# EAGLE board twip-mb-mirror (EAGLE 9.2.2)
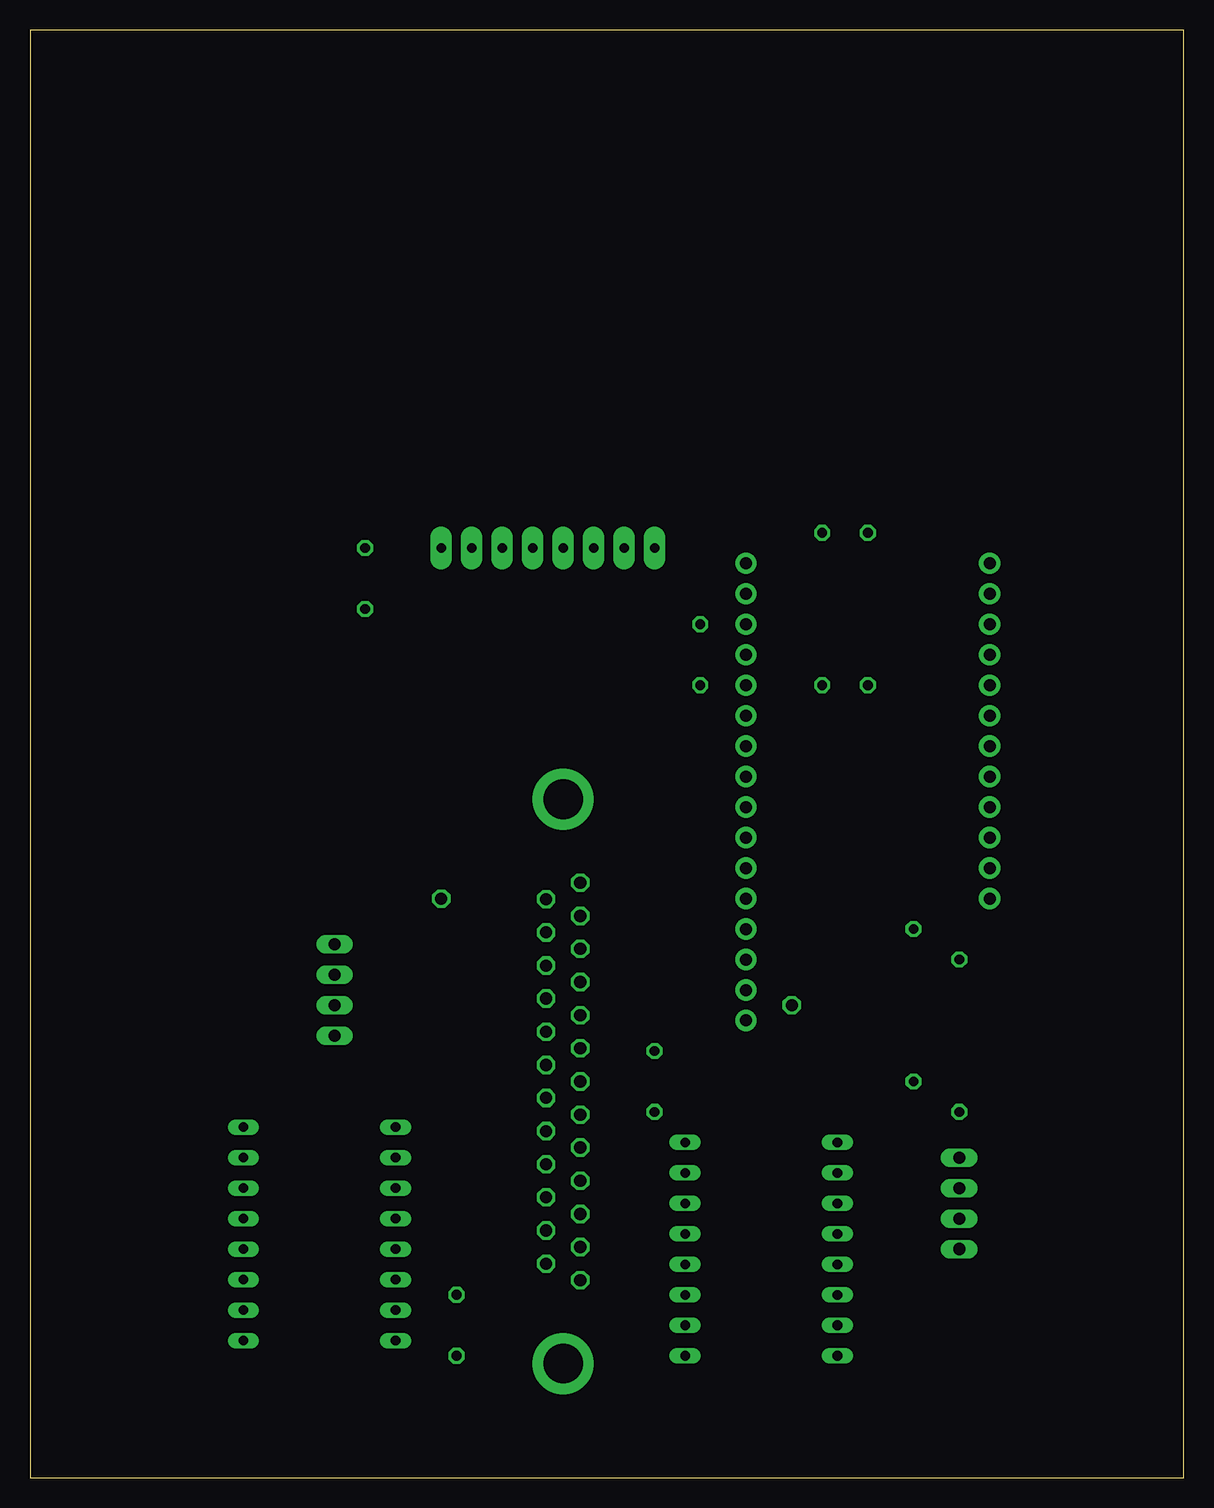
[diagram p0: board, top side]
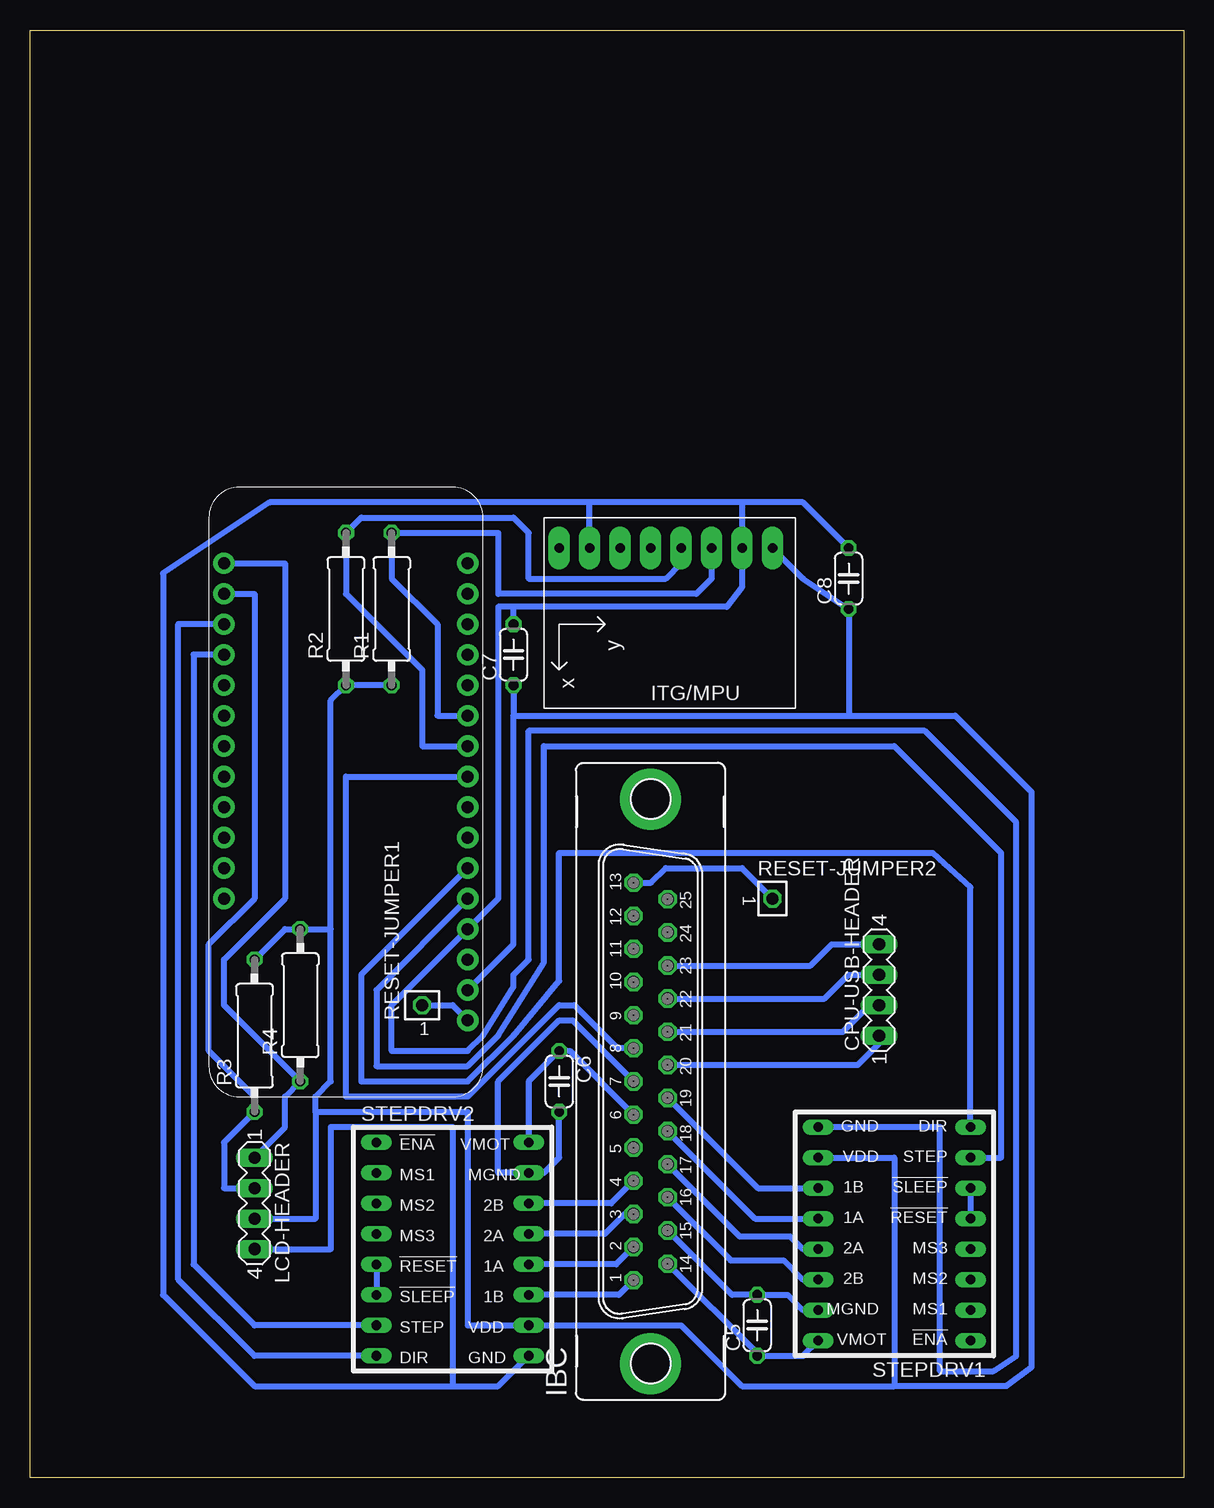
[diagram p1: board, bottom side, seen from below]

Size 96.19 x 120.64 mm. Coordinates in mm from the lower left corner, seen from the top.
Outline: 0,0 96.19,0 96.19,120.64 0,120.64 0,0
Copper layers (1*16): Top 0.035mm / dielectric 1.5mm / Bottom 0.035mm
Design rules "default": minimum track width 6mil, minimum drill 0.35mm, track to track 6mil, track to pad 6mil, pad to pad 6mil, via to via 6mil, smd to smd 6mil, copper to edge 40mil, drill to drill 6mil, minimum pad ring 10mil, minimum via ring 8mil, stop-mask expansion 4mil, vias tented up to drill 0mil, thermal gap 10mil

## Footprints (pad centres in the part's own frame; a part is rotated, then mirrored left to right if it is on the bottom)
C050-024X044 = drill 0.813 octagon: 1 -2.54,0; 2 2.54,0
MA04-1 = drill 1.016 long: 1 -3.81,0; 2 -1.27,0; 3 1.27,0; 4 3.81,0
M25VP = drill 1.016 octagon: 1 -16.561,1.422; 2 -13.792,1.422; 3 -11.049,1.422; 4 -8.28,1.422; 5 -5.512,1.422; 6 -2.769,1.422; 7 0,1.422; 8 2.769,1.422; 9 5.512,1.422; 10 8.28,1.422; 11 11.049,1.422; 12 13.792,1.422; 13 16.561,1.422; 14 -15.189,-1.422; 15 -12.421,-1.422; 16 -9.652,-1.422; 17 -6.909,-1.422; 18 -4.14,-1.422; 19 -1.372,-1.422; 20 1.372,-1.422; 21 4.14,-1.422; 22 6.909,-1.422; 23 9.652,-1.422; 24 12.421,-1.422; 25 15.189,-1.422 | drill 3.302 pad 5.08: G1 -23.52,0; G2 23.52,0
FEATHERWING_NOHOLES = drill 1 pad 1.778: 1 6.35,1.27; 2 8.89,1.27; 3 11.43,1.27; 4 13.97,1.27; 5 16.51,1.27; 6 19.05,1.27; 7 21.59,1.27; 8 24.13,1.27; 9 26.67,1.27; 10 29.21,1.27; 11 31.75,1.27; 12 34.29,1.27; 13 36.83,1.27; 14 39.37,1.27; 15 41.91,1.27; 16 44.45,1.27; 17 44.45,21.59; 18 41.91,21.59; 19 39.37,21.59; 20 36.83,21.59; 21 34.29,21.59; 22 31.75,21.59; 23 29.21,21.59; 24 26.67,21.59; 25 24.13,21.59; 26 21.59,21.59; 27 19.05,21.59; 28 16.51,21.59
0309/12 = drill 0.813 octagon: 1 -6.35,0; 2 6.35,0
TSW-101-XX-G-S = drill 1 pad 1.5 octagon: 1 0,0
POLOLULU2128 = drill 0.8 long: 1 -7.62,7.62; 2 -7.62,5.08; 3 -7.62,2.54; 4 -7.62,0; 5 -7.62,-2.54; 6 -7.62,-5.08; 7 -7.62,-7.62; 8 -7.62,-10.16; 9 5.08,-10.16; 10 5.08,-7.62; 11 5.08,-5.08; 12 5.08,-2.54; 13 5.08,0; 14 5.08,2.54; 15 5.08,5.08; 16 5.08,7.62
GY-521 = drill 0.8 pad 1.778 long: ADO -8.89,-6.35; GND -8.89,6.35; INT -8.89,-8.89; SCL -8.89,3.81; SDA -8.89,1.27; VCC -8.89,8.89; XCL -8.89,-3.81; XDA -8.89,-1.27

## Placement (x,y rotation side)
C5  [C050-024X044]  35.56,12.7 90 bottom
C6  [C050-024X044]  52.07,33.02 270 bottom
C7  [C050-024X044]  55.88,68.58 90 bottom
C8  [C050-024X044]  27.94,74.93 90 bottom
CPU-USB-HEADER  [MA04-1]  25.4,40.64 90 bottom
IBC  [M25VP]  44.45,33.02 90 bottom
LCD-HEADER  [MA04-1]  77.47,22.86 270 bottom
MS2  FEATHERWING_NOHOLES  [FEATHERWING_NOHOLES]  58.42,31.75 90 bottom
R1  2K2  [0309/12]  66.04,72.39 90 bottom
R2  2K2  [0309/12]  69.85,72.39 90 bottom
R3  2K2  [0309/12]  77.47,36.83 90 bottom
R4  2K2  [0309/12]  73.66,39.37 90 bottom
RESET-JUMPER1  TSW-101-07-G-S  [TSW-101-XX-G-S]  63.5,39.37 0 bottom
RESET-JUMPER2  TSW-101-07-G-S  [TSW-101-XX-G-S]  34.29,48.26 270 bottom
STEPDRV1  POLOLULU2128  [POLOLULU2128]  25.4,19.05 180 bottom
STEPDRV2  POLOLULU2128  [POLOLULU2128]  59.69,20.32 0 bottom
U1  GY-521MPU6050  [GY-521]  43.18,68.58 270 bottom

## Library data of the parts
C5-C8 = rcl; SPICEPREFIX: C
CPU-USB-HEADER LCD-HEADER = con-lstb; OC_FARNELL: unknown; OC_NEWARK: unknown
IBC = con-subd; OC_FARNELL: unknown; OC_NEWARK: unknown
MS2 = microbuilder
R1-R4 = resistor
RESET-JUMPER1 RESET-JUMPER2 = con-samtec; MF: Samtec Inc.; MPN: TSW-101-07-G-S
STEPDRV1 STEPDRV2 = stepper_drivers_etc
U1 = gy-521

## Nets
3V: C7.1 C8.1 LCD-HEADER.3 MS2.2 R1.1 R2.1 R3.2 R4.2 STEPDRV1.10 STEPDRV2.10 U1.VCC
N$1: IBC.13 RESET-JUMPER2.1
N$2: C6.2 IBC.7 STEPDRV2.15
N$3: IBC.16 STEPDRV1.14
N$4: IBC.17 STEPDRV1.13
N$5: MS2.5 STEPDRV1.7
N$6: IBC.18 STEPDRV1.12
N$7: IBC.19 STEPDRV1.11
N$8: IBC.1 STEPDRV2.11
N$9: IBC.2 STEPDRV2.12
N$10: IBC.3 STEPDRV2.13
N$11: LCD-HEADER.2 MS2.18 R3.1
N$12: IBC.4 STEPDRV2.14
N$13: CPU-USB-HEADER.4 IBC.23
N$14: CPU-USB-HEADER.3 IBC.22
N$15: MS2.6 STEPDRV1.8
N$16: MS2.1 RESET-JUMPER1.1
N$17: MS2.11 R1.2 U1.SCL
N$18: CPU-USB-HEADER.2 IBC.21
N$19: LCD-HEADER.1 MS2.17 R4.1
N$20: C5.2 IBC.15 STEPDRV1.15
N$21: C6.1 IBC.6 STEPDRV2.16
N$22: C5.1 IBC.14 STEPDRV1.16
N$23: STEPDRV1.5 STEPDRV1.6
N$24: STEPDRV2.5 STEPDRV2.6
N$25: MS2.10 R2.2 U1.SDA
N$27: MS2.19 STEPDRV2.8
N$28: IBC.8 MS2.9
N$29: MS2.20 STEPDRV2.7
N$30: CPU-USB-HEADER.1 IBC.20
N$35: C7.2 C8.2 LCD-HEADER.4 MS2.4 STEPDRV1.9 STEPDRV2.9 U1.ADO U1.GND

## Tracks (layer width: path | path; a pad name or v marks a point on that pad's centre or on a via)
3V
  Bottom 0.508: MS2.2 55.88,44.45 55.88,63.5 | STEPDRV1.10 24.13,26.67 24.13,7.62 | 24.13,7.62 14.82,7.62 12.7,9.21 12.7,57.15 19.05,63.5 27.94,63.5 | 55.88,63.5 27.94,63.5 | 24.13,7.62 36.83,7.62 41.91,12.7 STEPDRV2.10 59.69,12.7 59.69,30.48 72.39,30.48 | LCD-HEADER.3 72.39,21.59 72.39,30.48 | U1.VCC 31.75,74.93 C8.1 27.94,63.5 | C7.1 55.88,63.5 | 71.12,45.72 71.12,33.02 72.39,31.75 72.39,30.48 | 71.12,45.72 71.12,64.77 R2.1 R1.1 | R3.2 74.93,45.72 R4.2 71.12,45.72
N$1
  Bottom 0.508: IBC.13 44.4,49.58 43.18,50.8 36.83,50.8 RESET-JUMPER2.1
N$2
  Bottom 0.508: IBC.7 50.95,38.1 52.07,38.1 57.15,33.02 57.15,25.4 STEPDRV2.15 53.34,25.4 52.07,26.67 C6.2
N$3
  Bottom 0.508: IBC.16 37.77,18.11 33.35,18.11 31.75,16.51 STEPDRV1.14
N$4
  Bottom 0.508: IBC.17 37.03,20.12 32.82,20.12 31.75,19.05 STEPDRV1.13
N$5
  Bottom 0.508: STEPDRV1.7 15.24,26.67 15.24,52.07 24.13,60.96 53.34,60.96 53.34,42.93 57.15,36.83 59.69,34.29 67.31,34.29 67.31,40.64 MS2.5
N$6
  Bottom 0.508: IBC.18 35.74,21.59 STEPDRV1.12
N$7
  Bottom 0.508: IBC.19 35.51,24.13 STEPDRV1.11
N$8
  Bottom 0.508: 45.92,16.51 IBC.1 47.09,15.24 STEPDRV2.11
N$9
  Bottom 0.508: 46.05,19.05 IBC.2 47.32,17.78 STEPDRV2.12
N$10
  Bottom 0.508: 46.25,21.59 IBC.3 46.61,21.97 48.26,20.32 STEPDRV2.13
N$11
  Bottom 0.508: 76.2,24.13 LCD-HEADER.2 80.01,24.13 80.01,27.94 R3.1 77.47,31.75 81.28,35.56 81.28,44.45 77.47,48.26 77.47,73.66 MS2.18
N$12
  Bottom 0.508: IBC.4 47.75,22.86 STEPDRV2.14
N$13
  Bottom 0.508: IBC.23 31.12,42.67 29.35,44.45 CPU-USB-HEADER.4
N$14
  Bottom 0.508: IBC.22 29.95,39.93 27.97,41.91 CPU-USB-HEADER.3
N$15
  Bottom 0.508: STEPDRV1.8 17.78,49.18 19.98,51.18 20.96,52.07 52.07,52.07 52.07,41.4 55.88,36.83 59.69,33.02 68.58,33.02 68.58,41.91 MS2.6
N$16
  Bottom 0.508: RESET-JUMPER1.1 60.96,39.37 MS2.1
N$17
  Bottom 0.508: U1.SCL 39.37,74.93 40.64,73.66 57.15,73.66 57.15,78.74 R1.2 66.04,74.93 62.23,71.12 62.23,63.5 MS2.11
N$18
  Bottom 0.508: IBC.21 28.43,37.16 26.21,39.37 CPU-USB-HEADER.2
N$19
  Bottom 0.508: MS2.17 74.93,76.2 74.93,48.26 80.01,43.18 80.01,39.37 R4.1 74.93,31.75 74.93,29.21 LCD-HEADER.1
N$20
  Bottom 0.508: IBC.15 37.67,15.24 C5.2 33.02,15.24 31.75,13.97 STEPDRV1.15
N$21
  Bottom 0.508: STEPDRV2.16 54.61,33.02 C6.1 51.18,35.56 IBC.6
N$22
  Bottom 0.508: IBC.14 35.56,10.36 C5.1 31.75,10.16 STEPDRV1.16
N$23
  Bottom 0.508: STEPDRV1.6 STEPDRV1.5
N$24
  Bottom 0.508: STEPDRV2.5 STEPDRV2.6
N$25
  Bottom 0.508: U1.SDA 41.91,76.2 43.18,74.93 54.61,74.93 54.61,78.74 55.88,80.01 68.58,80.01 R2.2 69.85,73.66 63.5,67.31 63.5,60.96 MS2.10
N$27
  Bottom 0.508: MS2.19 83.82,71.12 83.82,16.51 77.47,10.16 STEPDRV2.8
N$28
  Bottom 0.508: IBC.8 47.22,35.79 50.8,39.37 52.07,39.37 59.69,31.75 69.85,31.75 69.85,58.42 MS2.9
N$29
  Bottom 0.508: MS2.20 82.55,68.58 82.55,17.78 77.47,12.7 STEPDRV2.7
N$30
  Bottom 0.508: IBC.20 27.19,34.39 25.4,36.18 CPU-USB-HEADER.1
N$35
  Bottom 0.508: 36.83,81.28 U1.GND 36.83,74.2 38.1,72.57 55.88,72.57 | 55.88,72.57 57.15,72.57 57.15,48.26 MS2.4 66.04,39.37 66.04,35.56 59.69,35.56 58.42,36.83 55.88,40.89 55.88,41.91 54.61,43.18 54.61,62.23 21.59,62.23 13.97,54.61 13.97,10.16 15.88,8.89 20.32,8.89 20.32,29.21 STEPDRV1.9 | 36.83,81.28 49.53,81.28 | 49.53,81.28 76.2,81.28 85.09,75.35 85.09,15.24 77.47,7.62 60.96,7.62 | 60.96,7.62 57.15,7.62 STEPDRV2.9 | LCD-HEADER.4 71.12,19.05 71.12,29.21 60.96,29.21 60.96,7.62 | U1.ADO 49.53,81.28 | C8.2 31.75,81.28 36.83,81.28 | C7.2 55.88,72.57